# EAGLE board MIC_amp (EAGLE 5.06)
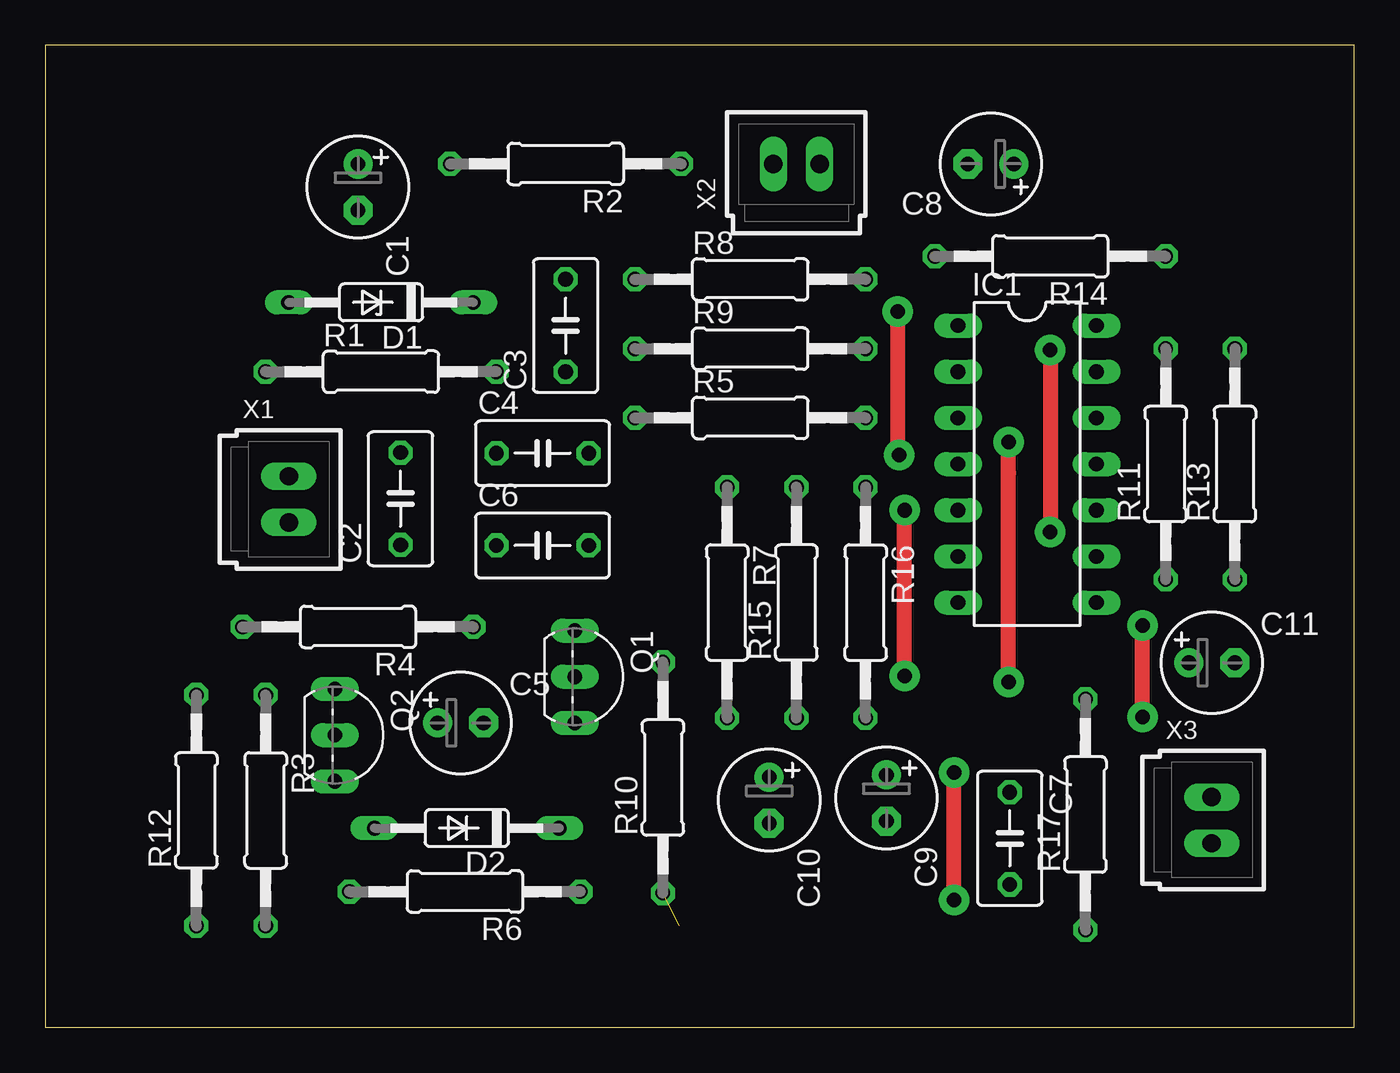
[diagram p0: board, top side]
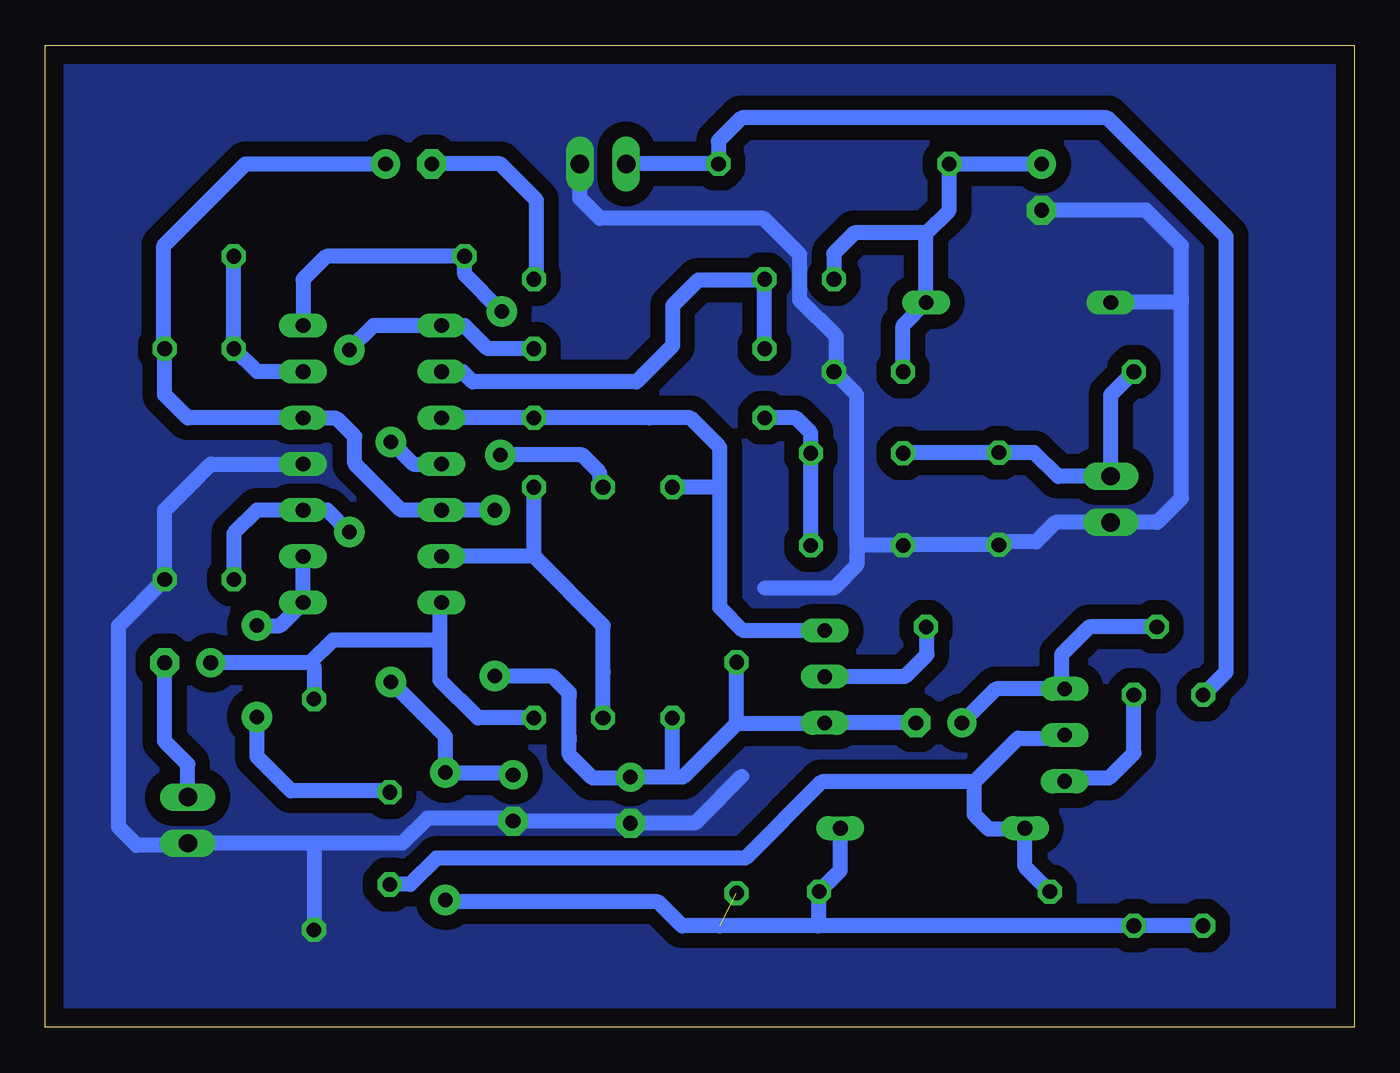
[diagram p1: board, bottom side, seen from below]

Size 72.02 x 54.01 mm. Coordinates in mm from the lower left corner, seen from the top.
Outline: 0,0 72.02,0 72.02,54.01 0,54.01 0,0
Copper layers (1*16): Top 0.035mm / dielectric 1.5mm / Bottom 0.035mm
Design rules "default *": minimum track width 10mil, minimum drill 24mil, track to track 8mil, track to pad 8mil, pad to pad 8mil, via to via 8mil, smd to smd 8mil, copper to edge 40mil, drill to drill 8mil, minimum pad ring 10mil, minimum via ring 8mil, stop-mask expansion 4mil, vias tented up to drill 0mil, thermal gap 10mil

## Footprints (pad centres in the part's own frame; a part is rotated, then mirrored left to right if it is on the bottom)
E2,5-6 = drill 0.813 pad 1.6 round: + -1.27,0 | drill 0.813 pad 1.6 octagon: - 1.27,0
C050-035X075 = drill 0.813 octagon: 1 -2.54,0; 2 2.54,0
DO35Z10 = drill 0.813 long: A 5.08,0; C -5.08,0
DO35-10 = drill 0.813 long: A 5.08,0; C -5.08,0
DIL14 = drill 0.813 long: 1 -7.62,-3.81; 2 -5.08,-3.81; 3 -2.54,-3.81; 4 0,-3.81; 5 2.54,-3.81; 6 5.08,-3.81; 7 7.62,-3.81; 8 7.62,3.81; 9 5.08,3.81; 10 2.54,3.81; 11 0,3.81; 12 -2.54,3.81; 13 -5.08,3.81; 14 -7.62,3.81
TO92-EBC = drill 0.813 long: B 0,-1.27; C -2.54,-1.27; E 2.54,-1.27
0207/12 = drill 0.813 octagon: 1 -6.35,0; 2 6.35,0
70543-02 = drill 1.016 long: 1 -1.27,0; 2 1.27,0

## Placement (x,y rotation side)
C1  100uF 35V  [E2,5-6]  17.2,46.22 270 top
C2  1000pF  [C050-035X075]  19.54,29.07 90 top
C3  0.1uF  [C050-035X075]  28.63,38.6 90 top
C4  0.1uF  [C050-035X075]  27.36,31.58 0 top
C5  1uF 35V  [E2,5-6]  22.85,16.74 0 top
C6  1000pF  [C050-035X075]  27.36,26.5 0 top
C7  0.022uF  [C050-035X075]  53.07,10.39 270 top
C8  1uF 35V  [E2,5-6]  52.03,47.49 180 top
C9  22uF 35V  [E2,5-6]  46.28,12.61 270 top
C10  22uF 35V  [E2,5-6]  39.83,12.49 270 top
C11  1uF 35V  [E2,5-6]  64.19,20.05 0 top
D1  6V1  [DO35Z10]  18.47,39.87 180 top
D2  1N4148  [DO35-10]  23.19,10.95 180 top
IC1  LM324N  [DIL14]  54.03,30.98 270 top
Q1  BC548B  [TO92-EBC]  30.4,19.28 270 top
Q2  BC558B  [TO92-EBC]  17.2,16.07 270 top
R1  1k  [0207/12]  18.47,36.06 0 top
R2  10k  [0207/12]  28.63,47.49 180 top
R3  10k  [0207/12]  12.12,11.93 270 top
R4  10k  [0207/12]  17.2,22.02 180 top
R5  22k  [0207/12]  38.79,33.52 0 top
R6  100k  [0207/12]  23.09,7.46 180 top
R7  100k  [0207/12]  37.52,23.36 270 top
R8  4k7  [0207/12]  38.79,41.14 0 top
R9  270k  [0207/12]  38.79,37.33 0 top
R10  10k  [0207/12]  33.98,13.73 90 top
R11  47k 35V  [0207/12]  61.65,30.98 90 top
R12  220E  [0207/12]  8.31,11.93 90 top
R13  2k2  [0207/12]  65.46,30.98 90 top
R14  100E  [0207/12]  55.3,42.41 180 top
R15  100k  [0207/12]  41.33,23.36 90 top
R16  100k  [0207/12]  45.14,23.36 270 top
R17  1k  [0207/12]  57.24,11.7 90 top
X1  C-GRID-02-70543  [70543-02]  13.39,29.04 270 top
X2  +12V  [70543-02]  41.33,47.49 0 top
X3  C-GRID-02-70543  [70543-02]  64.19,11.39 270 top

## Library data of the parts
C1-C11 R1-R17 = rcl
D1 D2 = diode
IC1 = linear
Q1 = transistor-npn
Q2 = transistor-pnp
X1-X3 = con-molex

## Nets
+12V: R2.1 R12.2 X2.1
GND: C1.- C2.1 C3.1 C6.1 C9.- C10.- D1.A IC1.11 R13.1 R17.1 X1.2 X2.2 X3.2
N$1: IC1.2 R8.1 R9.1
N$2: IC1.1 IC1.10 R9.2 R11.1
N$3: IC1.13 R11.2 R14.1
N$4: IC1.3 Q1.C R5.2 R7.1
N$5: IC1.14 R14.2 R15.2
N$6: IC1.6 R15.1 R16.1
N$7: C11.+ IC1.7 R16.2 R17.2
N$8: C7.1 IC1.8 IC1.9
N$9: C8.- R8.2
N$10: C5.- C8.+ C10.+ IC1.5 IC1.12 Q1.E R7.2 R10.2 R13.2
N$11: C7.2 D2.A Q2.B R6.2
N$12: Q1.B R4.1
N$13: C5.+ Q2.C R4.2
N$14: Q2.E R3.1
N$16: C1.+ C3.2 D1.C R1.2 R2.2
N$17: C2.2 C4.1 R1.1 X1.1
N$18: C4.2 C6.2 R5.1
N$24: C11.- X3.1
V+: C9.+ D2.C IC1.4 R3.2 R6.1 R10.1 R12.1

## Tracks (layer width: path | path; a pad name or v marks a point on that pad's centre or on a via)
+12V
  Bottom 0.813: X2.1 R2.1 34.98,48.76 33.71,50.03 13.58,50.03 7.04,43.49 7.04,34.79 7.04,19.55 R12.2
GND
  Bottom 0.813: 9.58,40 9.58,39.87 | 27.36,26.5 27.36,25.9 27.36,25.7 27.36,25.43 28.63,24.16 32.44,24.16 | 27.36,26.5 27.36,34.79 C3.1 28.5,36.19 28.5,38 30.5,40 30.5,42.5 32.5,44.5 41.5,44.5 42.6,45.6 X2.2 | IC1.11 62.92,30.98 65.46,28.44 R13.1 68,22.09 68,12.5 68,11 67,10 64.31,10 X3.2 57,10.12 | 9.58,40 9.5,39.92 9.5,29.1 10.83,27.77 X1.2 16.43,27.77 17.5,26.7 19.37,26.7 C2.1 24.79,26.53 C6.1 27.36,26.5 | D1.A 9.71,39.87 9.58,40 | C1.- 11.45,44.95 9.5,43 9.5,40.08 9.58,40 | 33.7,13.8 36,11.5 36.28,11.22 C10.- 39.95,11.34 C9.- 46.44,11.5 51,11.5 52.38,10.12 57,10.12 | R17.1 57.24,9.88 57,10.12
  pour Bottom (isolate 0.813, no thermals): 0.5,53.5 71.5,53.5 71.5,0.5 0.5,0.5
N$1
  Bottom 0.813: IC1.2 49.06,36.06 48.5,35.5 39.5,35.5 37.5,37.5 37.5,39.7 36.1,41.1 32.48,41.1 R8.1 R9.1
N$2  (via drill 0.8 pad 1.68)
  Top 0.813: v55.3,37.26 v55.3,27.24
  Bottom 0.813: R9.2 47.68,37.33 48.95,38.6 IC1.1 53.96,38.6 v55.3,37.26 | R11.1 61.65,27.17 60.38,28.44 IC1.10 56.5,28.44 v55.3,27.24
N$3
  Bottom 0.813: R14.1 R11.2 60.38,36.06 IC1.13
N$4
  Bottom 0.813: IC1.3 R5.2 38.79,33.52 36.52,33.52 34.9,31.9 34.9,29.7 | Q1.C 33.62,21.82 34.9,23.1 34.9,28.1 34.9,29.7 | R7.1 34.91,29.71 34.9,29.7
N$5  (via drill 0.8 pad 1.68)
  Top 0.813: v46.91,39.37 46.91,31.75 v46.98,31.48
  Bottom 0.813: IC1.14 57.84,41.14 56.57,42.41 R14.2 48.95,41.41 v46.91,39.37 | v46.98,31.48 42.48,31.48 41.5,30.5 41.5,29.88 R15.2
N$6
  Bottom 0.813: 45.14,25.9 41.33,22.09 41.33,19.55 R15.1 | 45.14,25.9 R16.1 | 45.14,25.9 IC1.6
N$7
  Bottom 0.813: 57.45,20.05 C11.+ | 57.45,20.05 56.2,21.3 52.5,21.3 50.3,21.3 | R17.2 57.24,19.84 57.45,20.05 | R16.2 48.21,17.01 50.3,19.1 50.3,21.3 | 50.3,21.3 50.3,23.28 IC1.7
N$8  (via drill 0.8 pad 1.68)
  Top 0.813: v60.38,17.07 v60.38,22.09
  Bottom 0.813: IC1.9 IC1.8 59.11,22.09 v60.38,22.09 | v60.38,17.07 60.38,14.88 58.5,13 53.14,13 C7.1
N$9
  Bottom 0.813: C8.- 46.99,47.49 45,45.5 45,41.28 R8.2
N$10  (via drill 0.8 pad 1.68)
  Top 0.813: v47.28,19.32 v47.28,28.44
  Bottom 0.813: C5.- Q1.E 29.17,16.7 34,16.7 | v47.28,28.44 IC1.5 52.44,28.44 55,31 55,32.5 56,33.5 57.82,33.5 IC1.12 64.19,33.52 65.46,34.79 R13.2 65.5,37.37 65.5,43 61.01,47.49 C8.+ | C10.+ 39.89,13.7 41.9,13.7 43.2,15 43.2,15.8 43.2,16 43.2,18.2 43.2,18.4 44.1,19.3 47.26,19.3 v47.28,19.32 | C10.+ 39.77,13.7 | 37.45,13.76 36.94,13.76 34,16.7 | 37.45,13.76 C10.+ | R10.2 33.98,16.72 34,16.7 | R7.2 37.52,13.83 37.45,13.76
N$11
  Bottom 0.813: C7.2 51.95,7.85 50.5,9.3 33.5,9.3 29.3,13.5 20.9,13.5 | 20.9,13.5 18.5,15.9 16.1,15.9 Q2.B | 20.9,13.5 20.9,11.7 20.1,10.9 18.16,10.9 D2.A 18.11,8.83 R6.2
N$12
  Bottom 0.813: Q1.B 24.72,19.28 23.5,20.5 23.5,21.97 R4.1
N$13
  Bottom 0.813: R4.2 14.58,22.02 16.1,20.5 16.1,18.78 Q2.C 19.71,18.61 C5.+
N$14
  Bottom 0.813: R3.1 12.12,15.08 13.5,13.7 15.76,13.7 Q2.E
N$16
  Bottom 0.813: C1.+ R2.2 22.28,44.95 23.55,43.68 | 23.55,43.68 D1.C 24.82,38.6 R1.2 | C3.2 28.63,42.57 27.5,43.7 23.57,43.7 23.55,43.68
N$17
  Bottom 0.813: R1.1 13.39,34.79 X1.1 16.3,30.3 17.61,31.61 C2.2 24.79,31.61 C4.1
N$18
  Bottom 0.813: C6.2 C4.2 29.9,32.7 30.72,33.52 R5.1
N$24
  Bottom 0.813: C11.- 65.46,15.74 64.19,14.47 X3.1
V+  (via drill 0.8 pad 1.68)  (1 unrouted)
  Top 0.813: v53,32.2 53,30.5 v53,19 | v50,7 v50,14
  Bottom 0.813: C9.+ 46.4,14 v50,14 50,16 v53,19 | R12.1 R3.2 29.5,5.58 | IC1.4 51.78,30.98 v53,32.2 | 29.5,5.58 34.9,5.58 36.98,5.58 38.3,6.9 49.9,6.9 v50,7 | D2.C 28.27,8.63 R6.1 29.44,5.64 29.5,5.58